# Altium PCB C59A2.PcbDoc
Units mm, origin at the board's own origin, x right, y up, seen from the top; angles counter-clockwise.
Board outline 52.35 x 19.46 mm, 4 copper layers (Top Layer, Internal Plane 1, Internal Plane 2, Bottom Layer); 34 components, 30 nets, 125 pads, 54 vias.
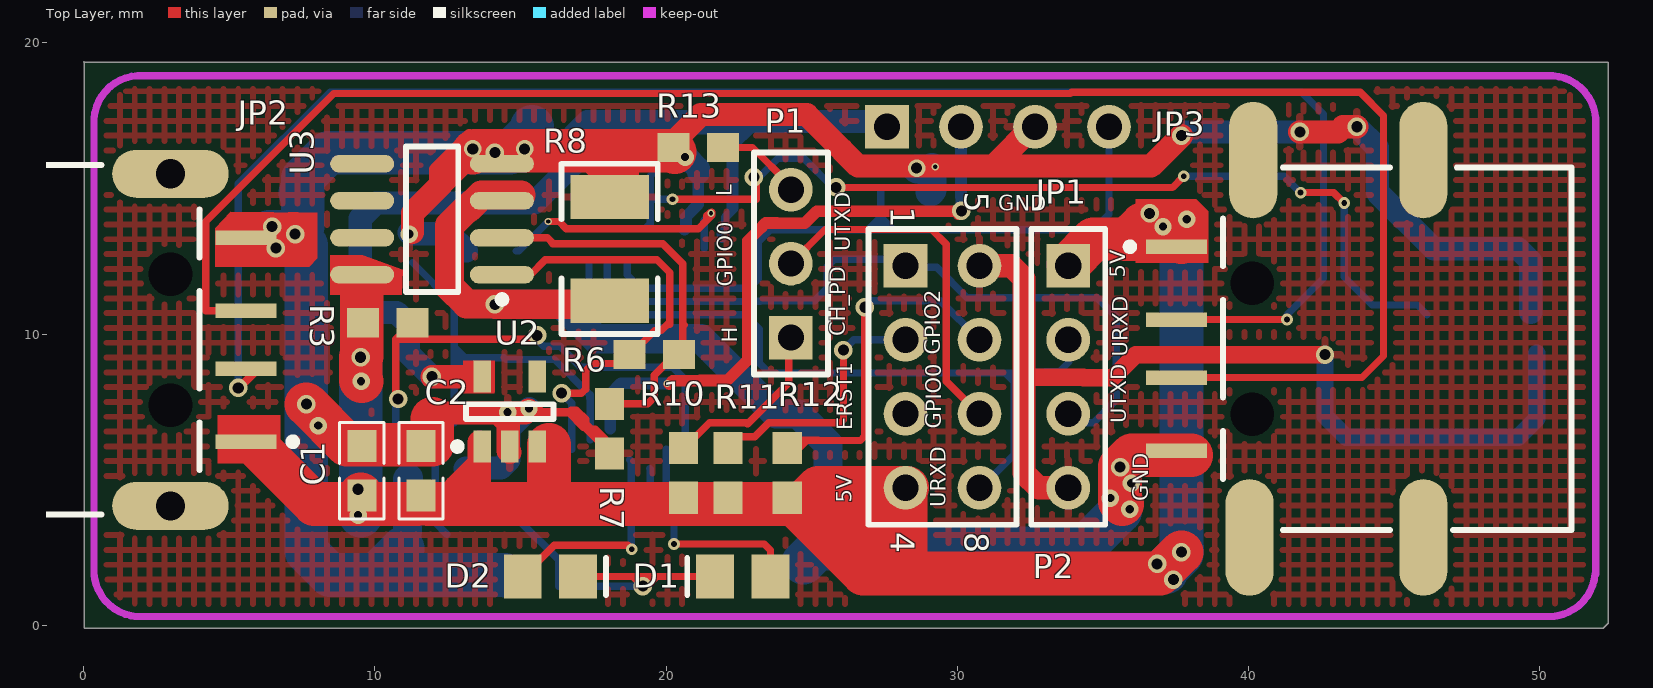
[diagram p0: Top Layer view]
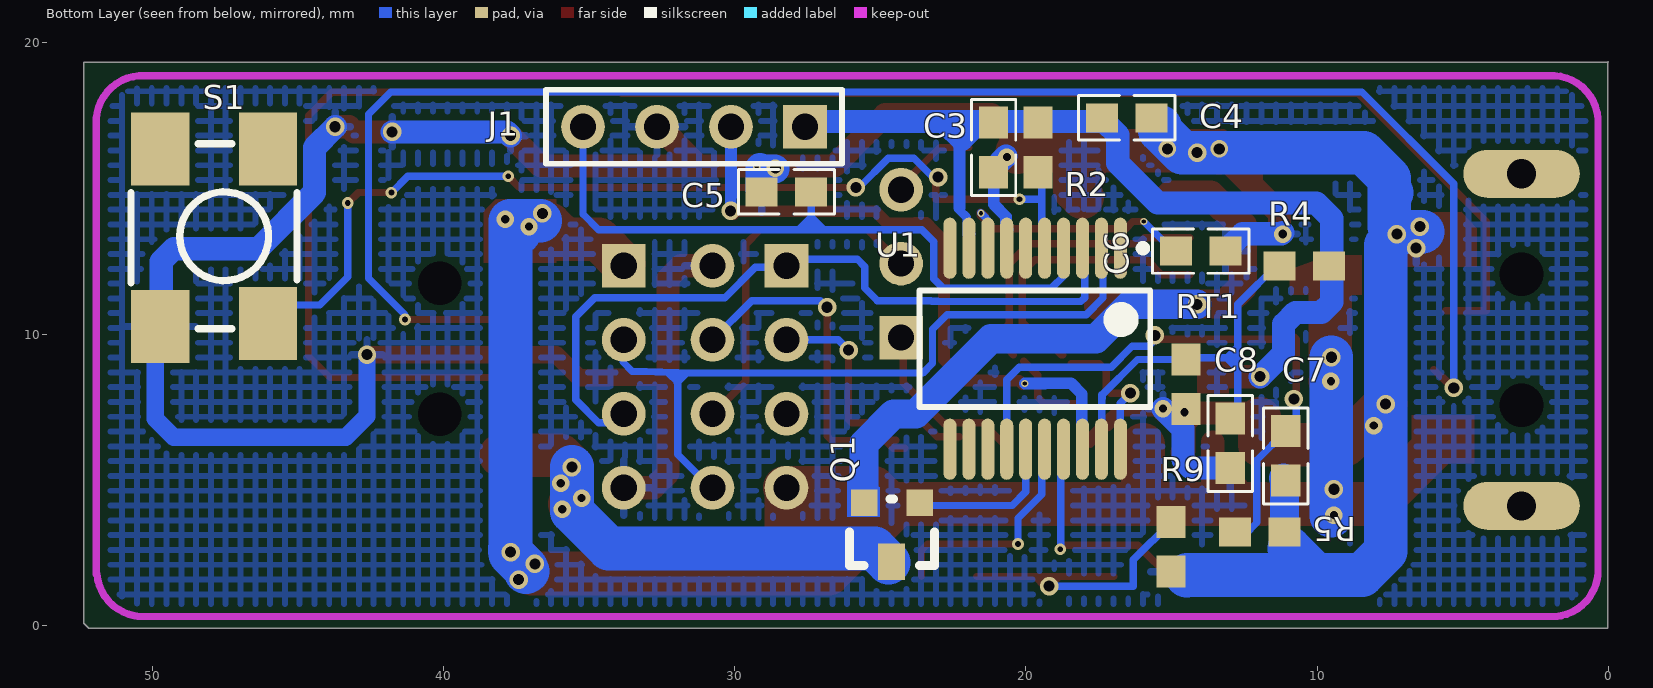
[diagram p1: Bottom Layer view, seen from below]
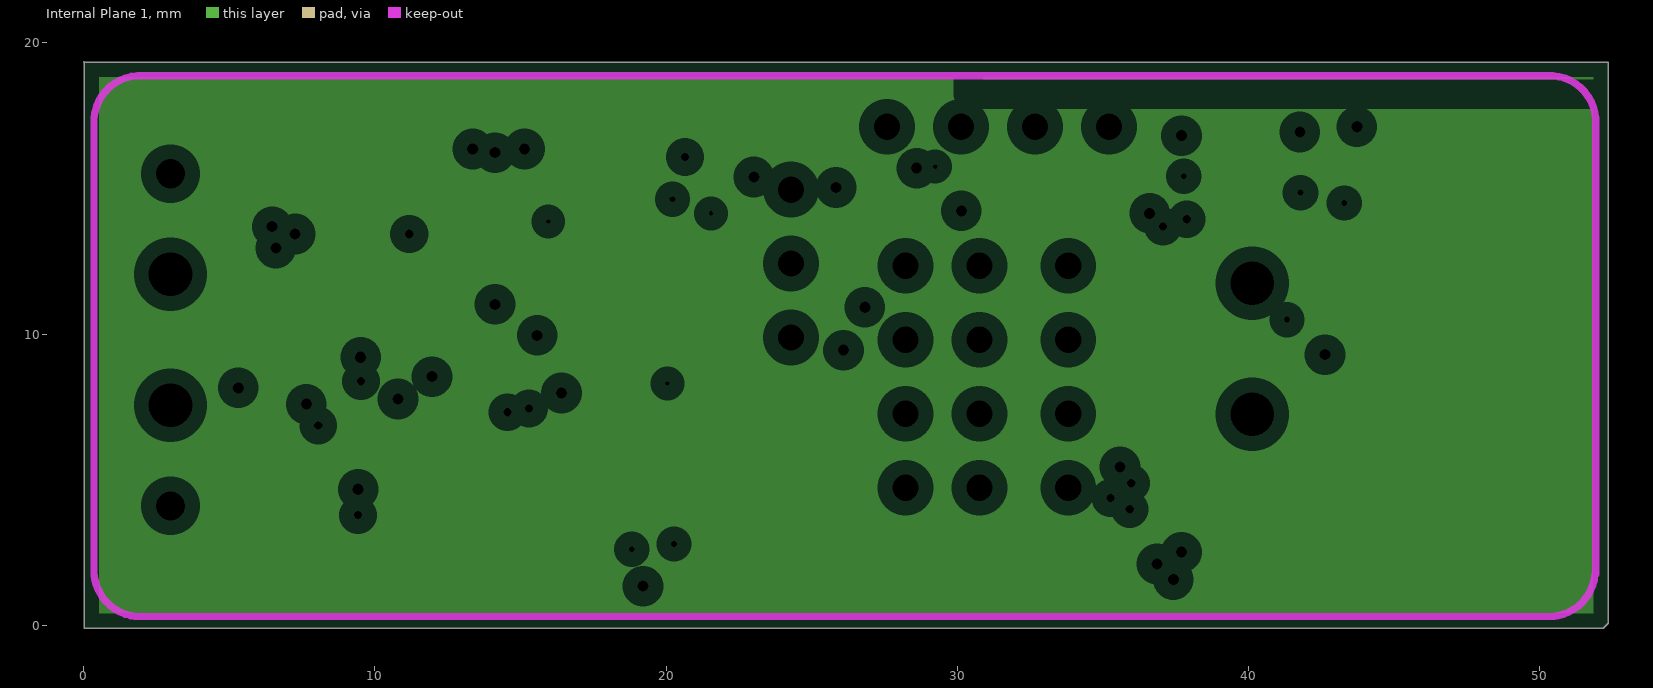
[diagram p2: Internal Plane 1, clearances drawn from the general rule]
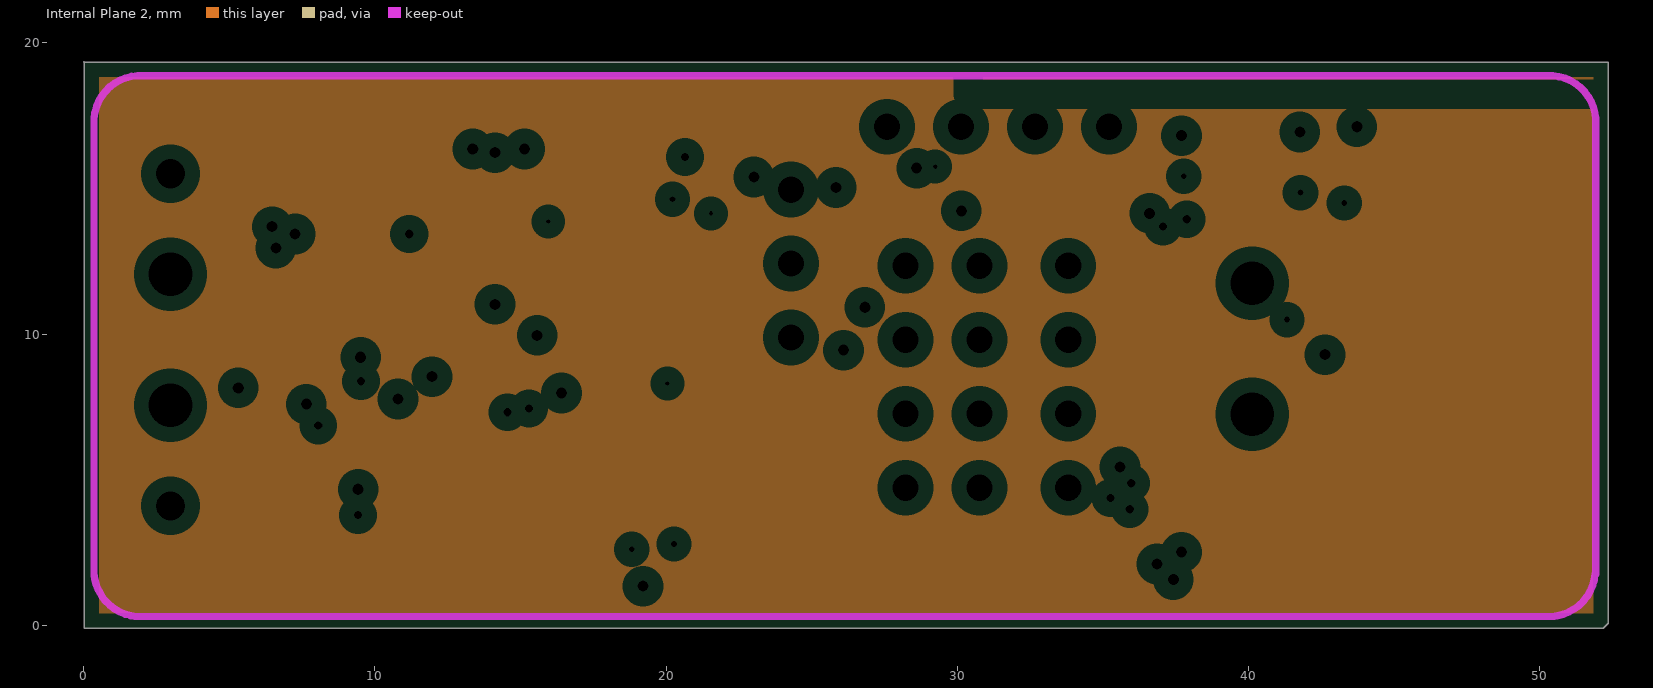
[diagram p3: Internal Plane 2, clearances drawn from the general rule]

## Layer stack, top to bottom
Top Layer: signal copper 0.0356
Dielectric: dielectric 0.32, FR-4, Dk 4.8
Internal Plane 1: plane copper 0.0356
Dielectric: dielectric 0.32, FR-4, Dk 4.8
Internal Plane 2: plane copper 0.0356
Dielectric: dielectric 0.32, FR-4, Dk 4.8
Bottom Layer: signal copper 0.0356

## Board outline
0,19.355 0.025,19.329 52.349,19.329 52.349,0.076 52.172,-0.102 0.025,-0.102 0.025,19.355

## Design rules (kind name [scope] priority, off if disabled: settings)
Clearance [All] p1: gap=0.2
PlaneClearance [All] p1: clearance=0.508
PlaneConnect [All] p1: planeconnectstyle=Relief reliefexpansion=0.508 reliefentries=4 reliefconductorwidth=0.254 reliefairgap=0.254
PolygonConnect [All] p1: connectstyle=Relief reliefconductorwidth=0.254 reliefentries=4 polygonreliefangle="90 Angle"
RoutingVias [All] p1: holewidth=0.6 width=1 viastyle="Through Hole" minholewidth=0.381 minwidth=0.635 maxholewidth=0.508 maxwidth=0.762
SilkscreenOverComponentPads [All] p1: minsilkscreentomaskgap=0.254
SolderMaskExpansion [All] p1: expansion=0.102
Width [All] p1: maxlimit=1.779 minlimit=0.2 preferedwidth=0.2 minimp=50.000000 maximp=50.000000 favimp=50.000000
25 further rules are at their usual default settings.

## Components (designator, comment, footprint, x,y, rotation, side; value= is the part's Value field where it differs from the comment)
C1 "104" 0603-1 9.55,5.309 r90 top
C2 "104" 0603-1 11.582,5.309 r90 top
C3 "104" 0603-1 21.107,16.408 r270 bottom
C4 "104" 0603-1 16.535,17.424 r180 bottom
C5 "104" 0603-1 28.219,14.884 r0 bottom
C6 "104" 0603-1 13.995,12.852 r180 bottom
C7 "104" 0603-1 11.074,5.817 r270 bottom
C8 "104" 0603-1 12.979,6.248 r270 bottom
D1 "AP指示灯" LED_0805 22.631,1.676 r180 top
D2 "STA指示灯" LED_0805 16.027,1.676 r0 top
J1 "CON4" HDR4X1_A 27.584,17.12 r0 bottom
JP1 "WIFI" HDR4X1_A 33.807,12.344 r270 top
JP2 "USB IN" USB/SM2.5-4H4A 0.279,9.804 r180 top
JP3 "USB OUT" USB/SM2.5-4H4b-B 42.824,9.5 r0 top
P1 "wifi烧录H/L" HDR1X3 24.282,9.881 r90 top
P2 "ESP6288" HDR2X4_CEN 28.219,12.344 r270 top
Q1 "AO3416" SOT-23 24.663,2.184 r0 bottom
R2 "1K" 0603-2 19.583,16.408 r90 bottom
R3 "1K" 0603-2 10.439,10.389 r180 top
R4 "10K" 0603-2 10.439,12.344 r180 bottom
R5 "1K" 0603-2 11.963,3.2 r0 bottom
R6 "1K" 0603-2 19.583,9.296 r180 top
R7 "1K" 0603-2 18.059,6.756 r90 top
R8 "0.05R" 1210 18.059,12.929 r90 top
R9 "Res2" 0603-2 15.011,2.692 r90 bottom
R10 "10K" 0603-2 20.599,5.232 r270 top
R11 "10K" 0603-2 22.123,5.232 r90 top
R12 "10K" 0603-2 24.155,5.232 r90 top
R13 "10K" 0603-2 21.107,16.408 r180 top
RT1 "10K" 0603-2 14.503,8.28 r90 bottom (schematic designator NCP18Xh103(RT1))
S1 "SW RES" "SW_PB4_A1 - 3.7" 47.523,13.36 r90 bottom
U1 "STM8S003F3-TSSOP20" SSOP-20 20.98,9.5 r270 bottom
U2 "SPX5205M5-3.3" SOT23-5 14.63,7.341 r90 top
U3 "LM358" SOIC8_N 11.963,13.945 r180 top

## Footprints (in the part's own frame and the unit in brackets; to place one, negate y for a bottom-side part, rotate by r counter-clockwise, add the part's x,y. Pads: shape width x height; smd on the part's side, far side on the other; paste and mask are expansions set on the pad)
0603-1 [mm] "贴片带丝印"
  rect 1.1x1 smd: 1(-0.85,0) 2(0.85,0)
  silkscreen extent -1.65,-0.76 1.65,0.76, body extent -1.14,-0.38 1.14,0.38, height 1
0603-2 [mm] "贴片无丝印"
  rect 1.1x1 smd: 1(-0.85,0) 2(0.85,0)
1210 [mil] "贴片元件"
  rect 60x106.3 smd: 1(-70,0) 2(70,0)
  silkscreen extent -115,-65 115,65, body extent -65,-50 65,50, height 39
HDR1X3 [mm] "Connector; Header; 3 Position"
  rect 1.5x1.5 hole 0.9: 1(0,0)
  round 1.5 hole 0.9: 2(2.54,0) 3(5.08,0)
  silkscreen extent -1.27,-1.27 6.35,1.27
HDR2X4_CEN [mm] "Connector; Header; 4x2 Position"
  rect 1.5x1.5 hole 0.9: 1(0,0)
  round 1.5 hole 0.9: 2(2.54,0) 3(5.08,0) 4(7.62,0) 5(0,2.54) 6(2.54,2.54) 7(5.08,2.54) 8(7.62,2.54)
  silkscreen extent -1.27,-1.27 8.89,3.81
HDR4X1_A [mm]
  rect 1.5x1.5 hole 0.9: 1(0,0)
  round 1.5 hole 0.9: 2(2.54,0) 3(5.08,0) 4(7.62,0)
  silkscreen extent -1.27,-1.27 8.89,1.27
LED_0805 [mm]
  rect 1.3x1.5 smd: 1(-0.95,0) 2(0.95,0)
  silkscreen extent 1.91,-0.63 1.91,0.64
SOIC8_N [mm]
  oval 2.2x0.6 smd: 1(-2.4,1.905) 2(-2.4,0.635) 3(-2.4,-0.635) 4(-2.4,-1.905) 5(2.4,-1.905) 6(2.4,-0.635) 7(2.4,0.635) 8(2.4,1.905)
  silkscreen extent -2.53,-2.5 0.9,2.88, body extent -1.95,-2.45 1.95,2.45, height 1.75
SOT23-5 [mm] "Max4173"
  rect 1.1x0.6 smd: 1(-1.2,0.95) 2(-1.2,0) 3(-1.2,-0.95) 4(1.2,-0.95) 5(1.2,0.95)
  silkscreen extent -1.32,-1.5 0.25,1.92, body extent -0.87,-1.5 0.87,1.5, height 1.45
SOT-23 [mil]
  rect 36x36 smd: 1(-40,-80) 3(35,-80)
  rect 36x50 smd: 2(-2,0)
  silkscreen extent -60,-85 55,5
SSOP-20 [mm]
  oval 2.1x0.45 smd: 1(-3.45,4.225) 2(-3.45,3.575) 3(-3.45,2.925) 4(-3.45,2.275) 5(-3.45,1.625) 6(-3.45,0.975) 7(-3.45,0.325) 8(-3.45,-0.325) 9(-3.45,-0.975) 10(-3.45,-1.625) 11(3.45,-1.625) 12(3.45,-0.975) 13(3.45,-0.325) 14(3.45,0.325) 15(3.45,0.975) 16(3.45,1.625) 17(3.45,2.275) 18(3.45,2.925) 19(3.45,3.575) 20(3.45,4.225)
  silkscreen extent -3.57,-2.67 2,5.25, body extent -2.8,-2.59 2.8,5.25, height 2
"SW_PB4_A1 - 3.7" [mm]
  rect 2.5x2 smd: 1(-3.1,2.2) 2(-3,-1.5) 3(3,-1.5) 4(3,2.2)
  silkscreen extent -3.17,-2.5 3.17,3.2, body extent -3.17,-2.54 3.18,3.2, height 6
USB/SM2.5-4H4A [mm]
  rect 2.1x0.5 smd: 1(-5.3,3.5) 2(-5.3,1) 3(-5.3,-1) 4(-5.3,-3.5)
  oval 4x1.65 hole 1: 5(-2.7,-5.7) 6(-2.7,5.7)
  round 1.2 hole 1.5 unplated: MH1(-2.7,-2.25) MH2(-2.7,2.25)
  silkscreen extent -7.02,-6 15.2,6
USB/SM2.5-4H4b-B [mm]
  rect 2.1x0.5 smd: 1(-5.3,3.5) 2(-5.3,1) 3(-5.3,-1) 4(-5.3,-3.5)
  oval 1.65x4 smd: 5(-2.794,-6.477) 5(3.175,-6.477) 6(-2.667,6.477) 6(3.175,6.477)
  round 1.2 hole 1.5 unplated: MH1(-2.7,-2.25) MH2(-2.7,2.25)
  silkscreen extent -7.02,-6.22 8.25,6.22

## Part data
C1 C2 C3 C4 C5 C6 C7 C8: library part 电容
D1 D2: library part LED
JP1 JP2 JP3: library part "4 HEADER", "4 Pin Header"
P1: library part "Header 3", "Header, 3-Pin"
P2: library part "Header 4X2A", "Header, 4-Pin, Dual row"
Q1: library part NMOS
R2 R3 R4 R5 R6 R7 R8 R10 R11 R12 R13 RT1: library part 电阻
R9: "Resistor"
S1: library part "SW SPST"
U1: library part SSOP-20
U2: library part SOT6

## Free pads (board coordinates)
  round 0.3 on Top Solder: 2(18.939,21.479) 3(18.289,21.362)

## Via types
v1: diameter 0.635, hole 0.381, Top Layer to Bottom Layer, 28 vias
v2: diameter 0.6, hole 0.281, Top Layer to Bottom Layer, 11 vias
v3: diameter 0.4, hole 0.2, Top Layer to Bottom Layer, 6 vias
v4: diameter 0.25, hole 0.15, Top Layer to Bottom Layer, 4 vias
v5: diameter 0.6, hole 0.381, Top Layer to Bottom Layer, 2 vias
v6: diameter 0.4, hole 0.21, Top Layer to Bottom Layer, 1 vias
v7: diameter 0.6, hole 0.38, Top Layer to Bottom Layer, 1 vias
v8: diameter 0.6, hole 0.3, Top Layer to Bottom Layer, 1 vias

## Nets (pads, with @x,y where several pads share a name; then routed paths per layer and width w, separated by ;. In a path a pad name is that pad's centre, name@x,y a point inside that pad or via, vN(x,y) a via of type N, cw(c..) or ccw(c..) an arc to the next point about the centre after c; other vN are vias at no path point)
3.3V: C3.1 C4.1 J1.1 R2.2 R4.2 U1.9 U2.5 | length 35.2
  Top Layer w0.8: v1(11.957,8.541) U2.5
  Bottom Layer w0.3: U1.9@21.92,13.284 22.03,13.394 22.03,14.013 22.276,14.258 22.276,14.329
  Bottom Layer w0.4: U1.9@21.93,13.437 U1.9@21.98,13.487 ; 22.276,14.329 22.276,17.297
  Bottom Layer w0.8: v1(11.957,8.541) 11.151,9.347 11.151,10.338 10.744,10.744 9.855,10.744 9.5,11.1 9.5,13.97 10.033,14.503 15.469,14.503 16.84,15.875 16.84,16.84 17.297,17.297 22.149,17.297 ; C3.1 21.629,17.258 22.2,16.688 22.708,17.196 22.708,17.297 ; 22.276,17.297 22.708,17.297 ; J1.1@27.838,17.297 22.708,17.297
5V: C1.1 C2.1 JP1.1 JP2.1 JP3.1 P2.4 R3.2 R10.2 R11.1 R12.1 U2.1 U2.3 U3.8 | length 92.9
  Top Layer w0.8: 12.776,4.216 12.776,4.758 13.58,5.563 ; 13.38,4.4 13.58,4.6 13.58,5.563 ; U2.1@13.58,6.291 13.58,5.563
  Top Layer w1.5: JP2.1@5.706,6.381 7.921,4.166 C2.1@11.455,4.166 ; C1.1@9.511,4.498 C1.1 ; v2@9.55,8.382 9.511,8.421 v1(9.511,9.207) 9.55,9.246 U3.8@9.55,11.913 ; C2.1@11.836,4.166 13.614,4.166 ; 13.38,4.4 13.614,4.166 ; 15.98,6.198 15.98,4.467 16.154,4.293 ; R11.1@22.25,4.166 21.361,4.166 ; R12.1@24.613,4.14 25.705,4.14 26.873,2.972 26.772,2.972 26.772,1.778 ; 24.714,4.216 25.222,4.724 P2.4 ; 26.67,4.166 R12.1@24.384,4.166 ; 27.178,2.489 28.219,3.531 P2.4 ; 27.635,2.032 26.772,2.896 26.772,4.242 27.254,4.724 P2.4@28.27,4.724 ; 28.169,2.184 28.219,2.235 P2.4 ; JP1.1@33.807,12.395 34.671,13.259 35.636,13.259 ; 36.347,13.767 35.839,13.259 35.636,13.259 ; 36.957,13.31 37.338,13.691 37.694,13.691 JP3.1@37.694,13.157 ; 37.617,13.259 35.636,13.259 ; v1(37.694,2.515) 36.957,1.778 26.772,1.778 ; 13.614,4.166 21.361,4.166 ; 21.361,4.166 R12.1@24.384,4.166 ; R12.1@24.384,4.166 26.772,1.778
  Bottom Layer w1.5: v2@9.511,3.759 v1(9.511,9.207) ; v1@36.678,13.894 v2@37.694,13.894 ; 37.109,1.854 37.694,2.438 37.694,3.962 ; 37.16,1.829 37.16,1.981 ; 37.389,13.487 37.389,13.589 v2@37.694,13.894 ; v1@37.719,2.642 37.719,2.54 37.16,1.981 ; 37.16,1.981 v1(37.694,2.515) 37.694,3.962 ; 37.694,3.962 v2@37.694,13.894
  other v1: 37.414,1.575 36.855,2.108 9.423,4.674 36.601,14.148
  other v2: 9.423,3.785 9.525,8.382 37.059,13.691 37.871,13.945
CH_PD: P2.2 R11.2 | length 8.8
  Top Layer w0.25: R11.2@22.276,6.477 23.04,6.477 23.33,6.767 23.521,6.957 25.195,6.957 ; 25.07,6.96 25.984,6.96 26.086,7.061 v1(26.086,9.449)
  Bottom Layer w0.25: v1(26.086,9.449) 26.441,9.804 P2.2
D+: JP2.2 JP3.2 | length 58.7
  Top Layer w0.25: 5.664,8.509 v1(5.309,8.153) 5.359,8.153 JP2.2@5.994,8.788 ; JP3.2 v3(41.316,10.5)
  Bottom Layer w0.25: v1(5.309,8.153) 5.309,15.164 8.458,18.313 41.808,18.313 42.57,17.551 42.57,11.914 41.316,10.66 v3(41.316,10.5)
D-: JP2.3 JP3.3 | length 62.1
  Top Layer w0.25: JP2.3 4.191,10.804 4.191,13.868 8.585,18.263 33.884,18.263 33.923,18.302 43.827,18.302 44.628,17.501 44.628,9.246 43.891,8.509 JP3.3@38.151,8.509
ERST1: P2.3
GND: C1.2 C2.2 C3.2 C4.2 C5.2 C6.2 C7.2 C8.2 J1.3 JP1.4 JP2.4 P2.5 R5.1 R7.1 R8.2 R9.1 R13.2 RT1.1 S1.1 U1.7 U2.2 U3.4 | length 155.7
  Top Layer w0.25: v2@15.164,7.291 16.662,7.291 ; v2@15.264,7.391 15.678,7.391 15.736,7.333 16.675,7.333 16.732,7.391 16.917,7.391 17.234,7.073 17.234,6.922 17.425,6.731 17.576,6.731 18.009,6.299 R7.1@18.009,6.045 ; 17.272,6.807 17.146,6.807 16.662,7.291 ; R7.1@17.78,6.223 16.99,7.013 16.99,7.291 ; R7.1@18.161,6.198 17.959,6.198 16.99,7.167 16.99,7.291 ; 16.662,7.291 16.99,7.291
  Top Layer w0.4: 11.735,14.656 12.052,14.973 ; 13.157,16.078 12.052,14.973 ; 13.233,16.84 12.052,15.659 12.052,15.291 12.052,14.973
  Top Layer w0.6: 32.283,8.509 32.289,8.514 34.325,8.514 34.331,8.509 35.331,8.509 36.119,9.296 v1(42.621,9.296)
  Top Layer w0.8: v8@11.289,13.487 11.289,14.159 13.36,16.231 v5@13.538,16.231 ; 11.963,7.087 12.167,7.291 14.229,7.291 ; U2.2@14.63,5.944 14.58,5.994 14.58,6.939 14.229,7.291 ; v2@15.264,7.391 15.164,7.291 14.229,7.291 ; R13.2 20.257,16.607 21.188,17.538 24.83,17.538 26.035,16.332 26.035,16.32 26.586,15.77 31.238,15.77 ; P2.5@30.709,12.344 31.852,12.344 32.283,11.913 32.283,8.509 32.283,5.232 32.791,4.724 JP1.4 ; J1.3@32.664,17.196 31.238,15.77 ; v1(37.694,16.815) 36.648,15.77 31.238,15.77 ; v1(41.758,16.942) 43.065,16.942 43.242,17.12 v1(43.713,17.12)
  Top Layer w1.5: JP2.4@5.279,13.335 5.31,13.304 JP2.4 ; JP2.4@5.706,13.381 7.193,13.381 7.137,13.437 v1(7.259,13.437) ; v1(7.645,7.595) 9.042,6.198 11.963,6.198 11.963,7.087 ; v5@13.36,16.231 13.426,16.297 16.789,16.297 ; R8.2 R8.2@18.074,14.722 ; R8.2@18.313,14.961 18.313,15.535 17.551,16.297 16.789,16.297 ; R13.2@20.295,16.256 20.254,16.297 16.789,16.297
  Bottom Layer w0.4: 11.938,13.462 11.76,13.462 11.735,13.487 12.51,13.487 C6.2 ; U1.7@20.63,13.589 20.68,13.639 20.68,14.033 21.107,14.46 C3.2
  Bottom Layer w0.6: v1(42.621,9.296) 42.621,7.188 43.358,6.452 48.717,6.452 49.251,6.452 49.886,7.087 S1.1@49.886,9.347
  Bottom Layer w0.8: v8@11.176,13.487 11.219,13.444 12.553,13.444 C6.2 ; C8.2@13.106,5.385 13.122,5.401 14.316,5.401 14.605,5.69 14.605,6.756 v2(15.291,7.442) ; C3.2@20.683,16.108 21.107,15.684 C3.2 ; v1(37.694,16.815) 37.821,16.942 40.767,16.942 v1(41.758,16.942) ; v1(43.713,17.12) 44.423,16.41 44.423,14.862 46.357,12.929 49.251,12.929 49.682,12.497 S1.1@49.682,10.744
  Bottom Layer w1: R5.1 11.113,5.017 C7.2@11.151,5.055 ; v7@28.619,15.67 29.081,15.67 29.134,15.723 29.134,14.949 C5.2
  Bottom Layer w1.5: v1@6.384,13.513 7.183,13.513 v1(7.259,13.437) ; 7.445,14.859 7.518,14.859 ; 10.947,2.642 10.033,1.727 ; 14.478,1.702 14.453,1.727 10.033,1.727 ; C4.2@15.392,17.12 15.392,16.993 14.63,16.231 9.601,16.231 8.407,16.231 7.518,15.342 7.518,14.859 ; v1(7.259,13.437) 7.645,13.051 7.645,12.167 v1(7.645,7.595) 7.645,2.54 8.458,1.727 10.033,1.727 ; v1(7.259,13.437) 7.518,13.696 7.518,14.859
  other v1: 6.599,12.954 6.472,13.691 14.122,16.231
  other v2: 8.052,6.858 14.554,7.315 20.65,16.078
  other v4: 29.235,15.748
  other v5: 13.36,16.358 15.138,16.358
  other v7: 28.6,15.697
  other v8: 11.176,13.437
GPIO0: P1.2 P2.7 | length 12.2
  Top Layer w0.25: P1.2 25.451,13.589 29.108,13.589 29.616,13.081 29.616,8.382 P2.7@30.683,7.315
GPIO2: P2.6 R12.2 | length 12.3
  Top Layer w0.25: R12.2 24.548,6.082 24.79,6.325 ; 25.121,6.35 26.67,6.35 26.822,6.502 v1(26.822,10.922)
  Top Layer w0.254: R12.2@24.46,6.35 25.226,6.35
  Bottom Layer w0.25: v1(26.822,10.922) 27.051,11.151 29.413,11.151 P2.6
LED1: D1.1 U1.16 | length 7.2
  Top Layer w0.254: v3(20.269,2.794) 23.368,2.794 23.581,2.581 D1.1
  Bottom Layer w0.254: U1.16@19.431,5.385 19.453,5.362 19.453,4.492 20.269,3.676 v3(20.269,2.794)
LED2: D2.1 U1.17 | length 7.8
  Top Layer w0.254: D2.1 16.053,2.652 16.154,2.753 18.034,2.753 ; 18.506,2.753 18.034,2.753 ; v3(18.821,2.616) 18.684,2.753 18.034,2.753
  Bottom Layer w0.254: U1.17@18.745,5.69 18.803,5.631 18.803,2.634 v3(18.821,2.616)
NetC6_1: C6.1 U1.8 | length 9.3
  Top Layer w0.254: v4(15.951,13.868) 16.323,13.868 16.574,13.618 21.111,13.618 21.399,13.906 ; v4@21.514,14.173 21.399,14.059 21.399,13.906 ; v4@21.565,14.178 21.565,14.072 21.399,13.906
  Bottom Layer w0.254: C6.1 14.935,12.852 v4@15.926,13.843 ; U1.8 21.305,13.913 21.4,14.008 ; v4(21.539,14.148) 21.4,14.008 ; v4@21.553,14.161 21.4,14.008
NetD1_2: D1.2 D2.2 R9.2 | length 13.2
  Top Layer w0.254: D2.2 18.847,1.676 v1@19.253,1.27 ; D2.2@17.247,1.676 19.685,1.676 ; v1@19.126,1.321 19.329,1.321 19.685,1.676 ; D1.2 19.685,1.676
  Bottom Layer w0.254: R9.2 16.307,2.247 16.307,1.346 v1(19.202,1.346)
NetJP3_4: JP3.4 Q1.2 | length 17
  Top Layer w1.5: 35.662,4.166 35.585,4.242 v1(35.585,5.436) 35.992,5.842 JP3.4@38.024,5.842
  Bottom Layer w1.5: Q1.2@24.714,2.159 25.197,2.642 29.21,2.642 34.315,2.642 35.585,3.912 v1(35.585,5.436)
  other v2: 35.916,3.988 35.255,4.369 35.966,4.877
NetP1_1: P1.1 R10.1 | length 6.3
  Top Layer w0.254: R10.1 20.611,6.082 21.488,6.959 22.759,6.959 22.789,6.929 22.804,6.929 24.206,8.331 24.206,9.881 P1.1@24.308,9.982 ; R10.1@20.752,6.35 R10.1@20.803,6.401
NetP1_3: P1.3 R13.1 | length 2.8
  Top Layer w0.25: R13.1 22.962,16.408 P1.3@24.206,15.164
NetQ1_3: Q1.3 R8.1 U3.3 | length 27.3
  Top Layer w0.8: U3.3@13.741,14.707 13.792,14.757 U3.3@15.088,14.757 ; R8.1@17.247,10.973 R8.1@17.475,11.201
  Top Layer w1: U3.3@15.011,14.783 15.009,14.781 13.665,14.781 13.194,14.31 13.149,14.31 12.563,13.724 12.563,11.625 13.149,11.04 14.106,11.04 v1(14.122,11.024) 17.45,11.024 R8.1@17.501,10.973
  Bottom Layer w1: v1(14.122,11.024) 16.406,11.024 17.588,9.842 21.197,9.842 22.382,8.656 22.382,8.654 23.779,7.258 24.543,7.258 25.552,6.248 Q1.3
NetR2_1: R2.1 S1.2 U1.5 | length 33.8
  Top Layer w0.25: v3(20.218,14.63) 23.092,14.63 ; v1(23.012,15.392) 23.089,15.316 23.089,14.656 ; v1(25.832,15.037) 27.026,15.037 37.389,15.037 v3(37.77,15.418) ; 33.241,15.037 33.249,15.045 ; v6(41.783,14.859) 42.926,14.859 v3(43.282,14.503)
  Bottom Layer w0.25: U1.5@19.329,13.665 19.455,13.791 19.455,14.63 ; R2.1 19.455,15.43 19.455,14.63 ; v3(20.218,14.63) 19.455,14.63 ; v1(23.012,15.392) 23.194,15.392 23.837,16.036 24.728,16.036 25.726,15.037 v1(25.832,15.037) ; v3(37.77,15.418) 41.224,15.418 v6(41.783,14.859) ; v3(43.282,14.503) 43.282,11.963 44.247,10.998 45.796,10.998 S1.2@46.126,10.668
NetR6_1: R6.1 R7.2 U3.2 | length 13.2
  Top Layer w0.254: U3.2 15.926,13.31 16.129,13.106 ; 16.104,13.106 19.888,13.106 20.574,12.421 20.574,10.021 ; R7.2 19.367,7.606 19.589,7.828 19.589,8.59 R6.1@20.066,9.068 ; R6.1 20.574,9.437 20.574,10.262 20.625,10.312
NRST: C5.1 J1.4 U1.4 | length 24.3
  Bottom Layer w0.254: U1.4@18.669,12.421 18.669,12.03 19.127,11.573 22.184,11.573 ; 22.26,11.573 22.834,11.573 23.157,11.896 23.157,13.175 23.533,13.551 ; 23.571,13.589 34.671,13.589 35.204,14.122 J1.4 ; 26.938,13.589 27.369,14.021 ; 27.33,13.589 27.369,13.628 27.369,14.021 ; C5.1 27.369,14.021 ; 27.788,13.589 27.788,13.603 27.369,14.021
ON/OFF: Q1.1 U1.15 | length 5.2
  Bottom Layer w0.254: U1.15 20.005,4.582 20.472,4.115 Q1.1@23.571,4.115
PB4: U1.12
PB5: U1.11
PC3: U1.13
SWIM: J1.2 U1.18 | length 25.3
  Top Layer w0.4: v4@20.116,8.28 20.232,8.396 21.149,8.396 21.16,8.407 22.098,8.407 22.809,9.119 22.809,13.208 23.152,13.551 ; 23.31,13.709 23.152,13.551 ; 23.585,13.83 23.787,13.83 ; 24.613,13.811 23.806,13.811 ; v1(30.137,14.233) 30.023,14.119 30.023,14.224 25.172,14.224 24.759,13.811 23.806,13.811 ; 23.152,13.551 23.419,13.818 23.799,13.818 23.806,13.811
  Bottom Layer w0.4: U1.18@18.08,6.756 18.08,7.946 18.447,8.312 19.348,8.312 19.355,8.306 v4(20.041,8.306) ; J1.2@30.023,17.247 30.137,17.133 v1(30.137,14.233) ; 30.124,14.707 J1.2 J1.2@30.429,17.12
TC: C8.1 R4.1 RT1.2 U1.19 | length 13.8
  Bottom Layer w0.254: R4.1@11.289,12.46 12.725,11.024 12.725,9.55 ; C8.1@12.725,6.96 12.725,9.195 ; 12.776,8.865 13.03,9.119 13.03,9.246 ; 13.03,9.195 13.03,9.246 ; RT1.2@14.427,9.195 12.725,9.195 ; RT1.2 16.165,9.13 17.374,7.922 17.374,7.798 ; U1.19@17.399,6.375 17.399,7.925 ; 12.725,9.195 12.725,9.55 ; 12.725,9.55 13.03,9.246
UI: R6.2 U1.20 U3.1 | length 14.6
  Top Layer w0.254: U3.1 15.342,12.04 15.85,12.548 19.685,12.548 20.117,12.116 20.117,10.338 ; v1(16.408,7.976) 17.094,7.976 17.232,8.114 17.232,8.749 17.475,8.992 R6.2@18.44,8.992 ; R6.2 18.78,9.296 19.607,10.123 19.829,10.123 20.12,10.414
  Bottom Layer w0.254: v1@16.434,7.95 16.755,7.629 U1.20
URXD: JP1.2 P2.8 U1.2 | length 25.5
  Bottom Layer w0.25: U1.2@17.348,12.395 17.348,11.248 17.93,10.667 22.709,10.667 23.207,10.168 23.207,8.996 23.542,8.661 31.471,8.661 ; P2.8@30.861,4.775 31.953,5.867 31.953,8.357 ; 31.979,8.331 31.648,8.661 31.471,8.661 ; 32.08,8.661 31.471,8.661 ; 32.258,8.661 31.953,8.357 ; JP1.2@33.833,9.474 33.833,9.042 33.52,8.729 31.953,8.679 31.953,8.357
UTXD: JP1.3 P2.1 U1.3 | length 25.5
  Bottom Layer w0.254: U1.3@17.983,12.548 17.983,11.252 18.117,11.119 23.022,11.119 23.029,11.125 23.229,11.125 23.255,11.151 25.095,11.151 25.527,11.582 25.527,12.319 25.781,12.573 P2.1@27.991,12.573 ; P2.1@28.016,12.421 P2.1@28.067,12.37 ; P2.1@28.042,12.319 P2.1@28.067,12.294 ; P2.1@28.067,12.243 P2.1@28.169,12.344 ; P2.1@28.27,12.294 29.286,12.294 30.328,11.252 34.798,11.252 35.458,10.592 35.458,7.747 34.671,6.96 JP1.3@33.68,6.96
UV: C7.1 R3.1 R5.2 U1.14 | length 20.7
  Top Layer w0.254: v1(10.795,7.772) 10.719,7.849 10.719,9.818 ; R3.1@10.934,10.033 10.719,9.818 ; v1@15.596,9.982 15.431,9.818 10.719,9.818
  Bottom Layer w0.254: C7.1@10.719,6.934 10.719,7.696 v1(10.795,7.772) ; C7.1@11.074,6.479 C7.1 12.065,5.676 12.065,3.531 R5.2@12.471,3.124 ; v1@15.443,9.931 15.79,9.584 16.353,9.584 17.073,8.865 20.227,8.865 20.655,8.436 U1.14
  other v1: 15.57,9.957
pads on no net: JP2.5 JP2.6 JP2.MH1 JP2.MH2 JP3.5 JP3.6 JP3.MH1 JP3.MH2 S1.3 S1.4 U1.1 U1.6 U1.10 U2.4 U3.5 U3.6 U3.7

## Polygon pours and split planes (outlines as drawn)
GND on Top Layer "Bottom Layer-No Net" (hatched 90Degree grid 0.508 track 0.203): 0.66,18.669 0.914,18.415 51.587,18.415 51.587,0.94 51.333,0.686 51.283,0.635 0.66,0.635
GND on Bottom Layer "Bottom Layer-No Net" (hatched 90Degree grid 0.508 track 0.203): 0.66,18.618 51.054,18.618 51.587,18.085 51.435,17.932 51.435,0.737 1.016,0.737 0.864,0.584
no net on Internal Plane 1 (split plane): 29.868,18.237 29.878,18.138 29.907,18.042 29.954,17.954 30.017,17.876 30.095,17.813 30.183,17.766 30.279,17.737 30.378,17.727 51.839,17.727 51.839,0.409 0.536,0.409 0.536,18.819 29.868,18.819
no net on Internal Plane 1 (split plane): 51.839,18.748 30.889,18.748 30.889,18.819 51.839,18.819
no net on Internal Plane 2 (split plane): 29.868,18.237 29.878,18.138 29.907,18.042 29.954,17.954 30.017,17.876 30.095,17.813 30.183,17.766 30.279,17.737 30.378,17.727 51.839,17.727 51.839,0.409 0.536,0.409 0.536,18.819 29.868,18.819
no net on Internal Plane 2 (split plane): 51.839,18.748 30.889,18.748 30.889,18.819 51.839,18.819

## Keep-outs
Keep-Out Layer:
  lines w0.254: 0.356,1.676 0.356,17.424 ; 0.356,2.007 ccw(c1.943,1.892) 1.829,0.305 ; 0.356,17.399 cw(c1.943,17.285) 2.057,18.872 ; 1.753,0.305 50.495,0.305 ; 2.007,18.872 48.692,18.872 50.444,18.872 cw(c50.33,17.285) 51.918,17.17 ; 50.19,0.305 ccw(c50.305,1.892) 51.892,1.778 ; 51.918,1.753 51.918,17.424

## Other copper
Top Layer:
  region net 3.3V: 14.097,7.976 14.122,8.001 14.122,9.093 13.03,9.093 13.03,7.976
  region net 5V: 4.597,7.214 6.756,7.214 6.756,4.293 5.486,5.563 4.597,5.563
  region net 5V: 36.119,14.63 38.202,14.63 38.608,14.224 38.608,12.446 36.119,12.446
  region net 5V: 8.458,11.354 10.922,11.354 10.947,12.217 9.576,12.7 8.458,12.7
  region net GND: 4.521,13.64 5.055,14.199 8.026,14.173 8.026,12.598 7.747,12.319 4.521,12.319
Bottom Layer:
  region net NetQ1_3: 25.019,4.75 25.019,3.734 26.137,3.734 26.137,5.08 25.959,5.258

## Silkscreen, mask and mechanical layers (free items; w line width, h text height)
Top Overlay:
  text "L" at 22.428,14.732 h0.9 r90
  text "GND" at 31.394,14.072 h0.9
  text "UTXD" at 26.492,12.852 h0.9 r90
  text "5V" at 35.941,11.938 h0.9 r90
  text "GPIO0" at 22.454,11.633 h0.9 r90
  text "CH_PD" at 26.314,9.931 h0.9 r90
  text "H" at 22.606,9.703 h0.9 r90
  text "GPIO2" at 29.591,9.296 h0.9 r90
  text "URXD" at 36.017,9.22 h0.9 r90
  text "UTXD" at 35.966,6.934 h0.9 r90
  text "GPIO0" at 29.616,6.756 h0.9 r90
  text "ERST1" at 26.568,6.706 h0.9 r90
  text "GND" at 36.728,4.267 h0.9 r90
  text "5V" at 26.543,4.216 h0.9 r90
  text "URXD" at 29.769,4.064 h0.9 r90
Mechanical 16:
  lines w0.254: -0.076,1.422 -0.076,17.577 ; -0.076,1.448 ccw(c1.638,1.587) 1.778,-0.127 ; -0.076,17.501 cw(c1.638,17.64) 1.499,19.355 50.749,19.355 ; 1.753,-0.127 50.825,-0.127 50.876,-0.076 ccw(c50.736,1.638) 52.451,1.778 ; 50.597,19.355 cw(c50.736,17.64) 52.451,17.78 ; 52.451,1.422 52.451,17.831
Drill Drawing:
  text ".Legend" at 15.596,17.628 h0.82
  text ".LEGEND" at 74.293,11.227 h0.82
  text "Drill Drawing." at 74.293,8.687 h0.82

## Text inside footprints (layer, text, board x,y; h text height)
JP2: Mechanical 1 "Mech 2 - Clearance, move to internal plane if present" at 1.279,3.128 h0.82 r180; Mechanical 1 "Mech 1 - Slot cut-out" at 1.279,2.628 h0.82 r180; Mechanical 1 "Assign keep-out area to slot" at 1.279,1.128 h0.82 r180; Mechanical 1 "Slot 1x2.5mm, PTH" at 1.279,2.128 h0.82 r180; Mechanical 1 "Alert PCB fab to slot details" at 1.279,1.628 h0.82 r180; Mechanical 1 "PCB Edge" at -0.193,14.977 h0.82 r270
P2: Top Overlay "8" at 30.251,3.2 h0.82 r270; Top Overlay "4" at 27.711,3.2 h0.82 r270; Top Overlay "1" at 27.711,14.376 h0.82 r270; Top Overlay "5" at 30.251,14.884 h0.82 r270